# Altium PCB PCB1.PcbDoc
Units mil, origin at the board's own origin, x right, y up, seen from the top; angles counter-clockwise.
Board outline 6000 x 4000 mil, 4 copper layers (Top Layer 1, Top Layer, Bottom Layer, Bottom Layer 1), stack 23.756 mil thick; 108 components, 91 nets, 250 pads, 2 vias.
Unrouted connection lines stored in the file: 137.
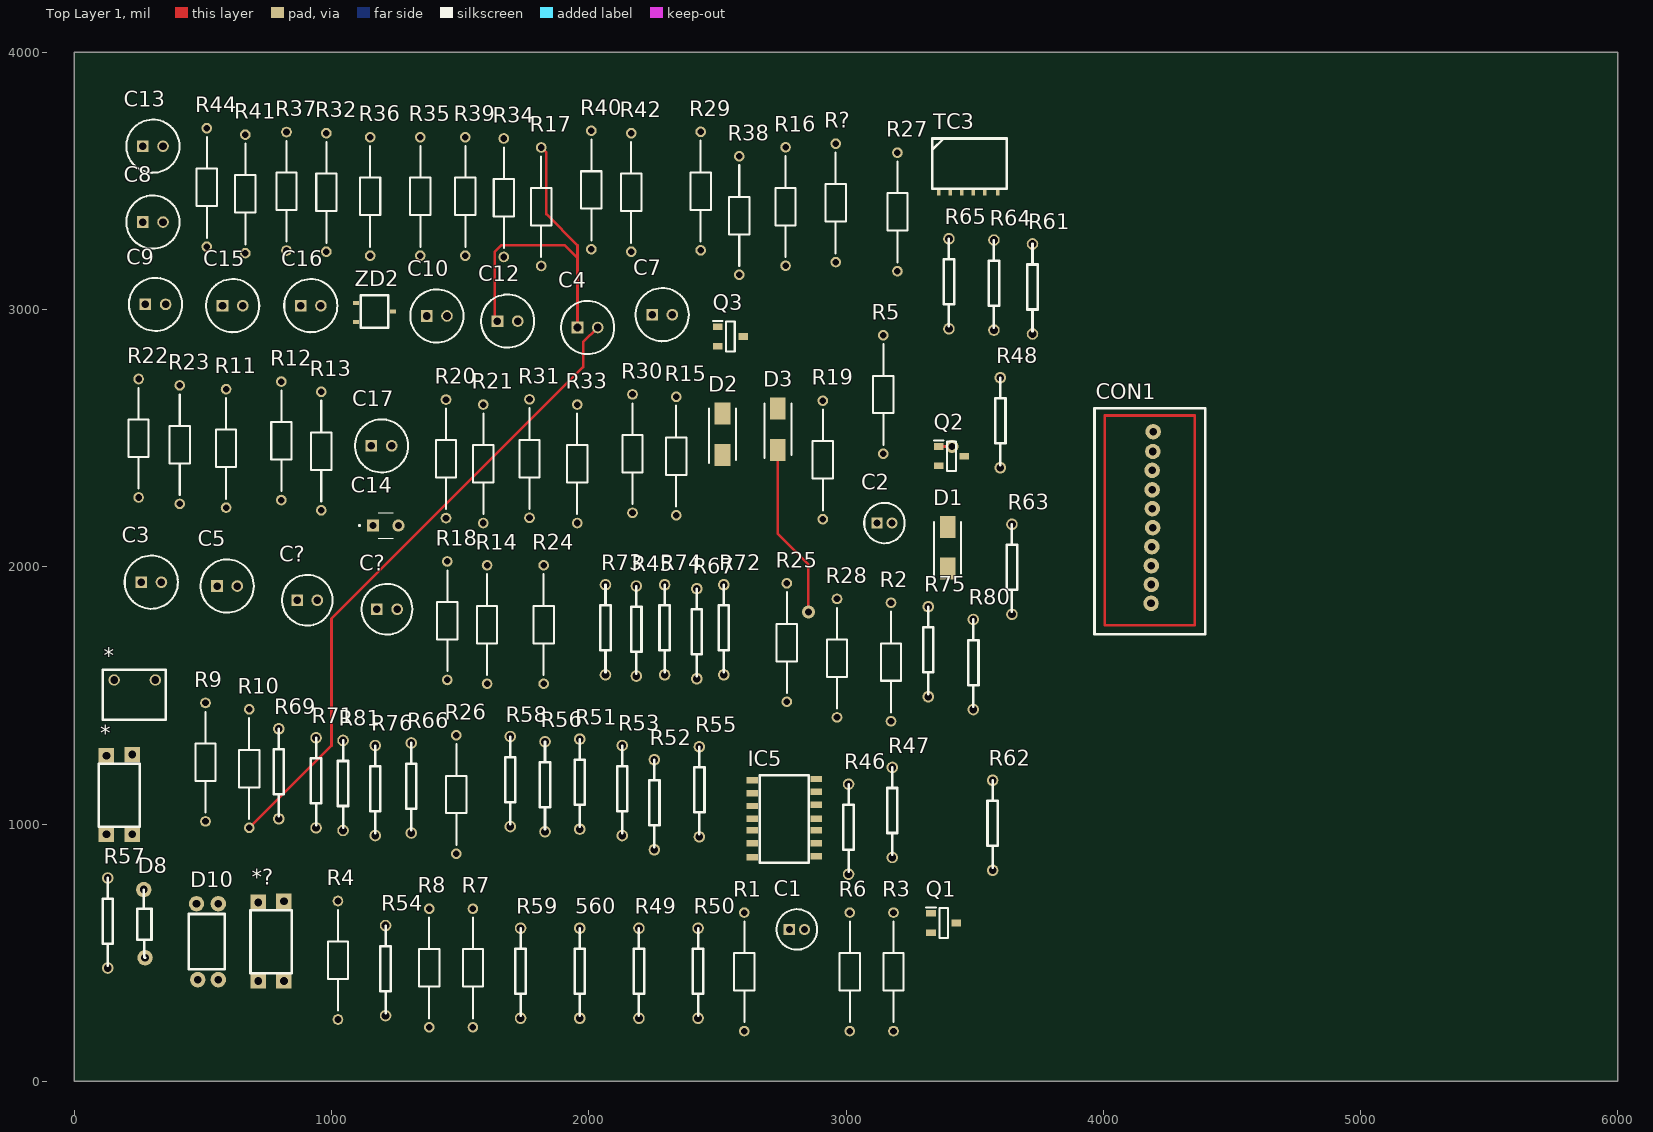
[diagram p0: Top Layer 1 view]
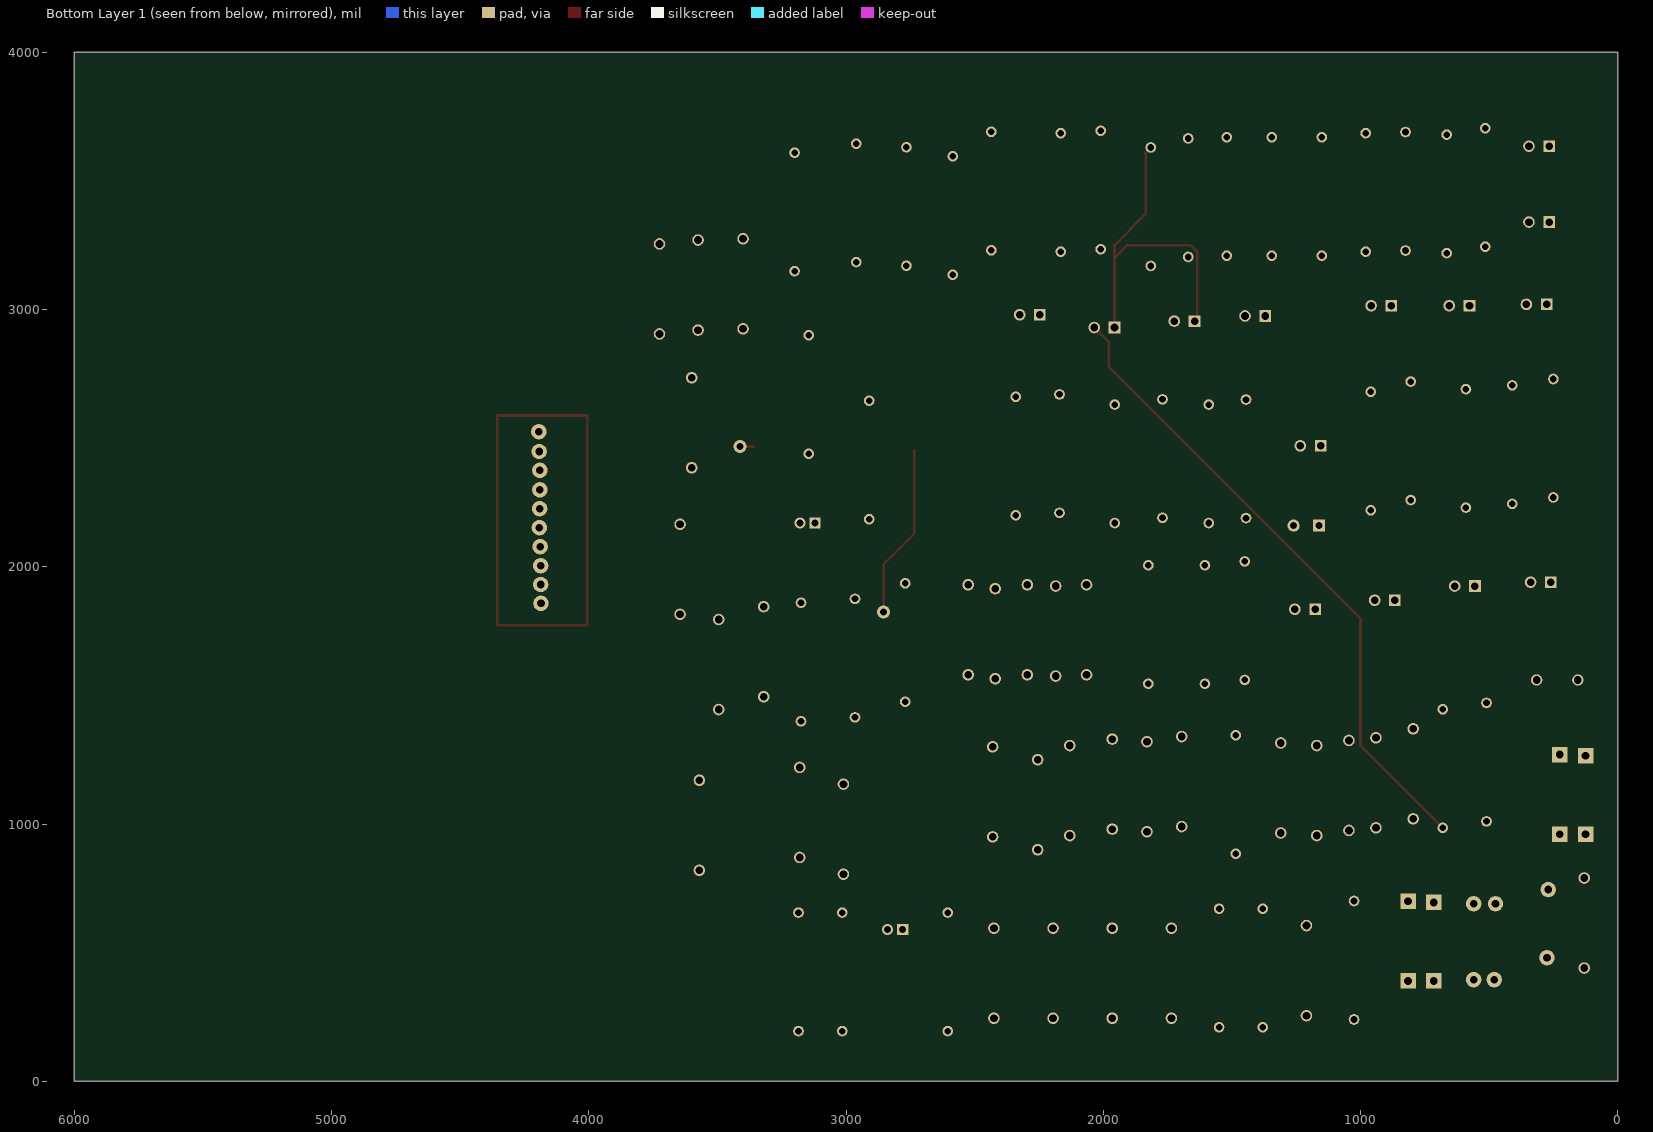
[diagram p1: Bottom Layer 1 view, seen from below]
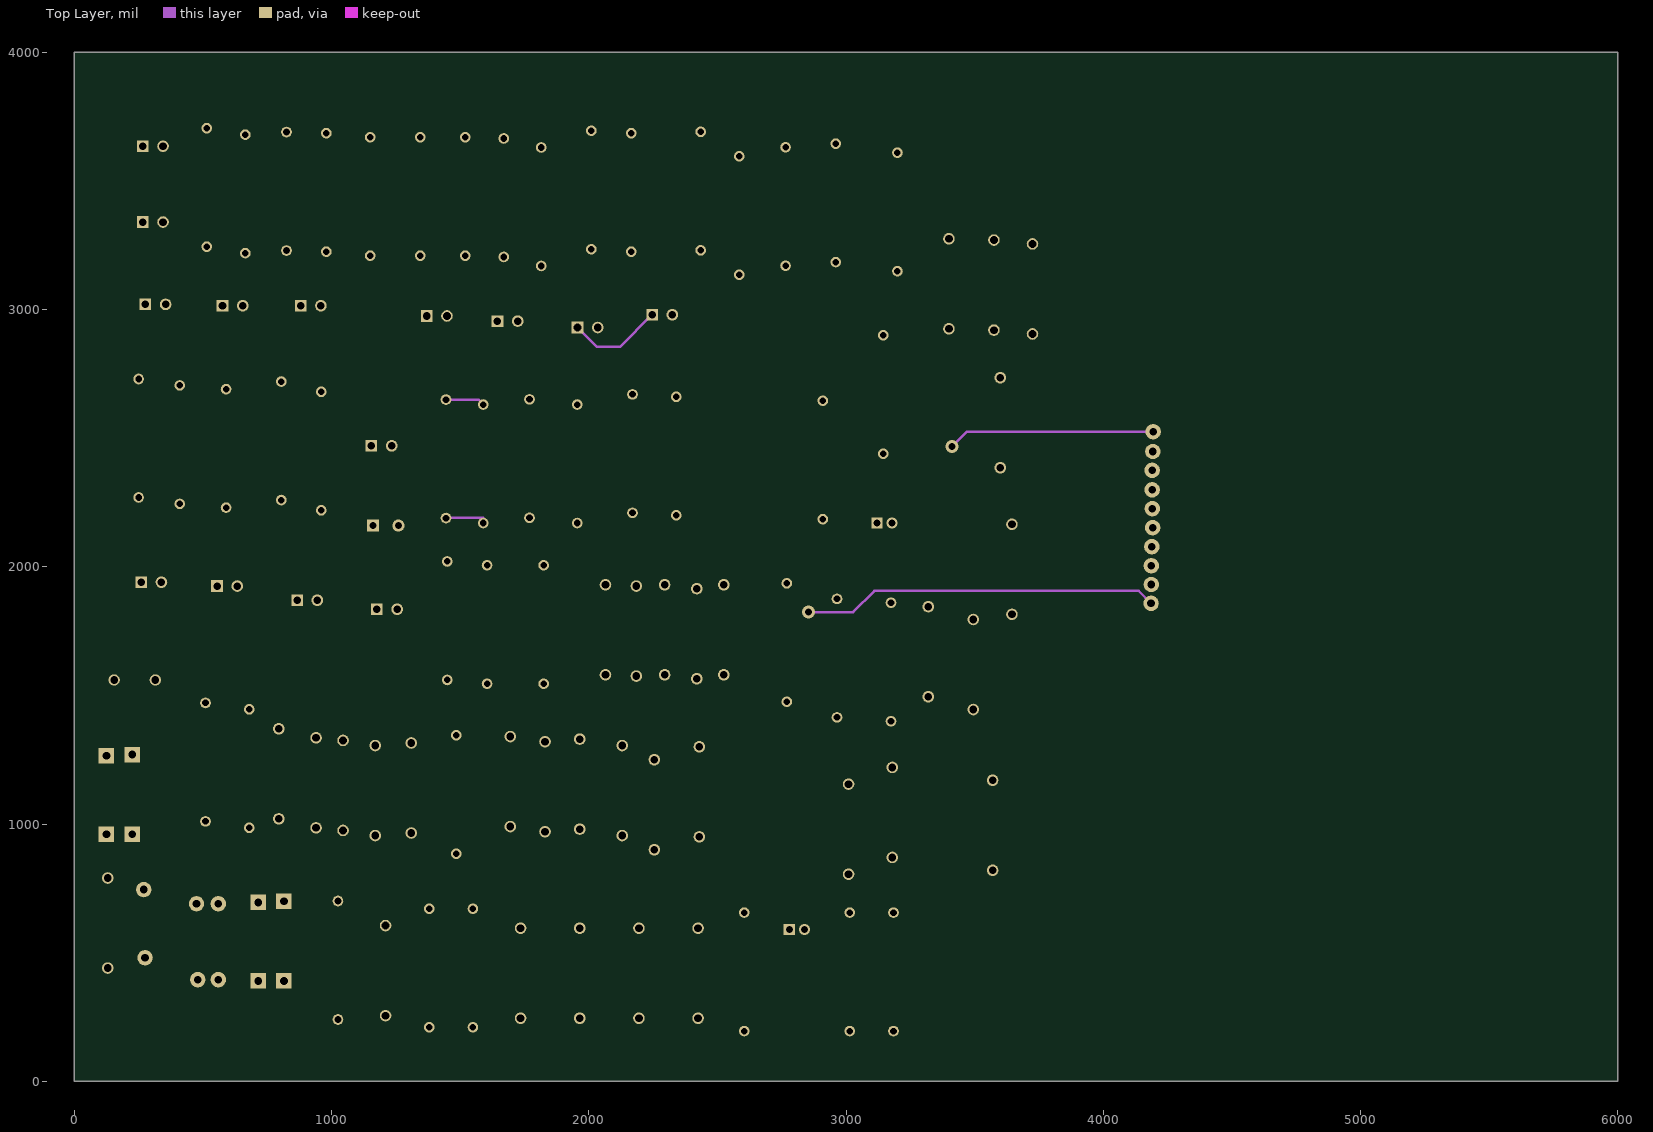
[diagram p2: Top Layer]

## Layer stack, top to bottom
Top Solder: solder mask 0.4, Solder Resist, Dk 3.5
Top Layer 1: signal copper 1.378
Dielectric 2: prepreg 2.8, PP-006, Dk 4.1
Top Layer: signal copper 1.4
Dielectric 1: dielectric 12.6, FR-4, Dk 4.8
Bottom Layer: signal copper 1.4
Dielectric 3: prepreg 2.8, PP-006, Dk 4.1
Bottom Layer 1: signal copper 1.378
Bottom Solder: solder mask 0.4, Solder Resist, Dk 3.5

## Board outline
0,0 6000,0 6000,4000 0,4000

## Design rules (kind name [scope] priority, off if disabled: settings)
Clearance [All] p1: gap=10 ignorepadtopadclearanceinfootprint=FALSE except(0: Arc-Hole Track-Hole SMDPad-Hole THPad-Hole Via-Hole Fill-Hole Poly-Hole Region-Hole Text-Hole)
PolygonConnect [All] p1: connectstyle=Relief reliefconductorwidth=10 reliefentries=4 polygonreliefangle="90 Angle" airgapwidth=10
RoutingVias [All] p1: holewidth=28 width=50 viastyle="Through Hole" minholewidth=28 minwidth=50 maxholewidth=28 maxwidth=50
SolderMaskExpansion [All] p1: expansion=4 istentingtop=FALSE
Width [All] p1: maxlimit=10 minlimit=10 preferedwidth=10
30 further rules are at their usual default settings.

## Classes and differential pairs
component class Sheet4: *? C38 C39 C40 C41 C42 D16 D17 D18 D21 D22 IC5 Q13 Q14 Q15 R66 R67 R69 R71 R72 R73 R74 R75 R76 R80 R81
component class Sheet3: 19 560 * *? BR2 C18 C19 C20 C21 C22 C23 C24 C25 C26 C27 C28 C29 C30 C31 C32 C33 C34 C35 C36 C37 D4 D5 D6 D7 D8 D9 D10 D11 D12 D13 D14 D15 D18 D20 IC4 Q11 Q12 R45 R46 R47 R48 R49 R50 R51 R52 R53 R54 R55 R56 R57 R58 R59 R61 R62 R63 R64 R65 R79 TC3
component class Sheet2: C15 C16 C17 CON1 D2 D3 Q3 R29 R30 R31 R32 R33 R34 R35 R36 R37 R38 R39 R40 R41 R42 R44 T7 T8 T9 T10 ZD2
component class Sheet1: * C1 C2 C3 C4 C5 C7 C8 C9 C10 C12 C13 C14 C? D1 IC KDS184 MDD? Q1 Q2 R1 R2 R3 R4 R5 R6 R7 R8 R9 R10 R11 R12 R13 R14 R15 R16 R17 R18 R19 R20 R21 R22 R23 R24 R25 R26 R27 R28 R? T? Z02W22VY

## Components (designator, comment, footprint, x,y, rotation, side; value= is the part's Value field where it differs from the comment)
560 "Component_1" PCBComponent_1#1 2065,410 r90 top
* "Component_1" PCBComponent_1#2 190,1110 r90 top
* "Component_1" PCBComponent_1#3 175,1495 r0 top
*? "Component_1" PCBComponent_1#2 780,540 r90 top
C1 "100nF" CAPPRD150W50D400H600 2779.65,590 r0 top
C2 "100nF" CAPPRD150W50D400H600 3120,2170 r0 top
C3 "1uF" CAPPRD200W55D525H1200 260,1940 r0 top
C4 "N.C" CAPPRD200W55D525H1200 1956.26,2930 r0 top
C5 "33nF" CAPPRD200W55D525H1200 555,1925 r0 top
C7 "10nF" CAPPRD200W55D525H1200 2246.26,2980 r0 top
C8 "0.1nF" CAPPRD200W55D525H1200 266.26,3340 r0 top
C9 "100nF" CAPPRD200W55D525H1200 276.26,3020 r0 top
C10 "1nF" CAPPRD200W55D525H1200 1370,2975 r0 top
C12 "100nF" CAPPRD200W55D525H1200 1645,2955 r0 top
C13 "1nF" CAPPRD200W55D525H1200 266.26,3635 r0 top
C14 "330pF" FA18 1161.58,2160 r0 top
C15 "105" CAPPRD200W55D525H1200 576.26,3015 r0 top
C16 "8.2UF" CAPPRD200W55D525H1200 880,3015 r0 top
C17 "1UF" CAPPRD200W55D525H1200 1155,2470 r0 top
C? "220nF" CAPPRD200W55D500H1250 1176.26,1835 r0 top
C? "220nF" CAPPRD200W55D500H1250 866.26,1870 r0 top
CON1 "SMAW200A" SMAW200A 4397,1752 r90 top
D1 "US1M" DIOM5127X229N 3395,2074.29 r90 top
D2 "US1M" DIOM5127X229N 2520,2515 r90 top
D3 "US1M" DIOM5127X229N 2735,2534.29 r90 top
D8 "zdm801" PCBComponent_1#4 380,650 r90 top
D10 "Component_1" PCBComponent_1#5 605,540 r90 top
IC5 "Component_1" PCBComponent_1#6 2760,1015 r0 top
Q1 "KTN2907AS" SOT95P245X130-3N 3379.65,615 r0 top
Q2 "MMBTA92" SOT95P245X130-3N 3410,2430 r0 top
Q3 "MMBTA92" SOT95P245X130-3N 2550.79,2895 r0 top
R1 "0J" RESAD1170W45L370D200 2604.65,195 r90 top
R2 "4.7KF" RESAD1170W45L370D200 3175,1399.37 r90 top
R3 "10KF" RESAD1170W45L370D200 3184.65,195 r90 top
R4 "10KF" RESAD1170W45L370D200 1025,240 r90 top
R5 "10KF" RESAD1170W45L370D200 3145,2439.37 r90 top
R6 "10KF" RESAD1170W45L370D200 3014.65,195 r90 top
R7 "1KF" RESAD1170W45L370D200 1549.65,210 r90 top
R8 "18KF" RESAD1170W45L370D200 1379.65,210 r90 top
R9 "1KF" RESAD1170W45L370D200 510,1010 r90 top
R10 "10KF" RESAD1170W45L370D200 680,985 r90 top
R11 "43KF" RESAD1170W45L370D200 590,2230 r90 top
R12 "N.C" RESAD1170W45L370D200 805,2259.37 r90 top
R13 "0J" RESAD1170W45L370D200 960,2219.37 r90 top
R14 "240KF" RESAD1170W45L370D200 1604.65,1545 r90 top
R15 "0J" RESAD1170W45L370D200 2340,2200 r90 top
R16 "62KF" RESAD1170W45L370D200 2765,3170 r90 top
R17 "N.C" RESAD1170W45L370D200 1815,3169.37 r90 top
R18 "51KF" RESAD1170W45L370D200 1450,1560 r90 top
R19 "10KF" RESAD1170W45L370D200 2910,2185 r90 top
R20 "100nF" RESAD1170W45L370D200 1445,2189.37 r90 top
R21 "8.2nF" RESAD1170W45L370D200 1590,2170 r90 top
R22 "10KF" RESAD1170W45L370D200 250,2269.37 r90 top
R23 "2W" RESAD1170W45L370D200 410,2244.37 r90 top
R24 "10KF" RESAD1170W45L370D200 1824.65,1545 r90 top
R25 "10KF" RESAD1170W45L370D200 2770,1475 r90 top
R26 "10KF" RESAD1170W45L370D200 1485,884.37 r90 top
R27 "10KF" RESAD1170W45L370D200 3200,3149.37 r90 top
R28 "10KF" RESAD1170W45L370D200 2965,1414.37 r90 top
R29 "3.3MF" RESAD1170W45L370D200 2435,3230 r90 top
R30 "3.3MF" RESAD1170W45L370D200 2170,2209.37 r90 top
R31 "51KF" RESAD1170W45L370D200 1769.65,2190 r90 top
R32 "130KF" RESAD1170W45L370D200 980,3225 r90 top
R33 "1MF" RESAD1170W45L370D200 1955,2170 r90 top
R34 "51KF" RESAD1170W45L370D200 1670,3204.37 r90 top
R35 "1KF" RESAD1170W45L370D200 1345,3209.37 r90 top
R36 "5.1KF" RESAD1170W45L370D200 1150,3209.37 r90 top
R37 "220J" RESAD1170W45L370D200 825,3229.37 r90 top
R38 "100KF" RESAD1170W45L370D200 2585,3135 r90 top
R39 "5.1J" RESAD1170W45L370D200 1520,3209.37 r90 top
R40 "51KF" RESAD1170W45L370D200 2010,3234.37 r90 top
R41 "1W" RESAD1170W45L370D200 665,3219.37 r90 top
R42 "1KF" RESAD1170W45L370D200 2165,3225 r90 top
R44 "1KF" RESAD1170W45L370D200 515,3244.37 r90 top
R45 "Component_1" PCBComponent_1#1 2285,1740 r90 top
R46 "Component_1" PCBComponent_1#1 3110,970 r90 top
R47 "Component_1" PCBComponent_1#1 3280,1035 r90 top
R48 "Component_1" PCBComponent_1#1 3700,2550 r90 top
R49 "Component_1" PCBComponent_1#1 2295,410 r90 top
R50 "Component_1" PCBComponent_1#1 2525,410 r90 top
R51 "Component_1" PCBComponent_1#1 2065,1145 r90 top
R52 "Component_1" PCBComponent_1#1 2355,1065 r90 top
R53 "Component_1" PCBComponent_1#1 2230,1120 r90 top
R54 "Component_1" PCBComponent_1#1 1310,420 r90 top
R55 "Component_1" PCBComponent_1#1 2530,1115 r90 top
R56 "Component_1" PCBComponent_1#1 1930,1135 r90 top
R57 "Component_1" PCBComponent_1#1 230,605 r90 top
R58 "Component_1" PCBComponent_1#1 1795,1155 r90 top
R59 "Component_1" PCBComponent_1#1 1835,410 r90 top
R61 "Component_1" PCBComponent_1#1 3825,3070 r90 top
R62 "Component_1" PCBComponent_1#1 3670,985 r90 top
R63 "Component_1" PCBComponent_1#1 3745,1980 r90 top
R64 "Component_1" PCBComponent_1#1 3675,3085 r90 top
R65 "Component_1" PCBComponent_1#1 3500,3090 r90 top
R66 "Component_1" PCBComponent_1#1 1410,1130 r90 top
R67 "Component_1" PCBComponent_1#1 2520,1730 r90 top
R69 "Component_1" PCBComponent_1#1 895,1185 r90 top
R71 "Component_1" PCBComponent_1#1 1040,1150 r90 top
R72 "Component_1" PCBComponent_1#1 2625,1745 r90 top
R73 "Component_1" PCBComponent_1#1 2165,1745 r90 top
R74 "Component_1" PCBComponent_1#1 2395,1745 r90 top
R75 "Component_1" PCBComponent_1#1 3420,1660 r90 top
R76 "Component_1" PCBComponent_1#1 1270,1120 r90 top
R80 "Component_1" PCBComponent_1#1 3595,1610 r90 top
R81 "Component_1" PCBComponent_1#1 1145,1140 r90 top
R? "1KF" RESAD1170W45L370D200 2960,3184.37 r90 top
TC3 "Component_1" PCBComponent_1#7 3450,3570 r0 top
ZD2 "KIA2431AS" KIA2431AS 1114,2930 r0 top

## Footprints (in the part's own frame and the unit in brackets; to place one, negate y for a bottom-side part, rotate by r counter-clockwise, add the part's x,y. Pads: shape width x height; smd on the part's side, far side on the other; paste and mask are expansions set on the pad)
CAPPRD150W50D400H600 [mm]
  rect 1.1x1.1 hole 0.7: 1(0,0)
  round 1.1 hole 0.7: 2(1.5,0)
  silkscreen extent -1.25,-2 2.75,2, body extent -1.5,-2.24 3,2.24, height 6
CAPPRD200W55D500H1250 [mm]
  rect 1.15x1.15 hole 0.75: 1(0,0)
  round 1.15 hole 0.75: 2(2,0)
  silkscreen extent -1.5,-2.5 3.5,2.5, body extent -1.74,-2.75 3.75,2.75, height 12.5
CAPPRD200W55D525H1200 [mm]
  rect 1.15x1.15 hole 0.75: 1(0,0)
  round 1.15 hole 0.75: 2(2,0)
  silkscreen extent -1.62,-2.62 3.63,2.62, body extent -1.74,-2.75 3.75,2.75, height 12
DIOM5127X229N [mm]
  rect 2.2x1.55 smd: 1(-2.05,0) 2(2.05,0)
  silkscreen extent -2.82,-1.33 2.55,1.33, body extent -2.55,-1.33 2.55,1.33, height 2.29
FA18 [mm]
  rect 1.2x1.2 hole 0.7: 1(0,0)
  round 1.2 hole 0.7: 2(2.5,0)
  silkscreen extent -1.4,-1.25 2,1.25, body extent -1.41,-1.25 3.87,1.25, height 5.69
KIA2431AS [mm]
  rect 0.55x0.4 smd: 1(-0.483,2.413) 2(-0.483,0.559) 3(3.175,1.575)
  silkscreen extent 0,0 2.69,3.17, body extent 0.13,0.13 2.59,3.05, height 1
PCBComponent_1#1 [mil]
  round 45 hole 30: 1(-165,100) 2(185,100)
  silkscreen extent -155,80 185,120
PCBComponent_1#2 [mil]
  rect 60x60 hole 30: 46(-150,65) 47(-150,-35) 48(155,65) 49(160,-35)
  silkscreen extent -120,-65 125,95
PCBComponent_1#3 [mil]
  round 44 hole 30: 1(-20,65) 2(140,65)
  silkscreen extent -65,-90 180,105
PCBComponent_1#4 [mil]
  round 60 hole 30: 1(-170,105) 2(95,110)
  silkscreen extent -170,80 95,135
PCBComponent_1#5 [mil]
  round 60 hole 30: 1(-145,125) 2(-145,45) 3(150,130) 4(150,45)
  silkscreen extent -105,20 110,160
PCBComponent_1#6 [mil]
  rect 45x25 smd: 1(-125,155) 2(125,160) 3(-125,105) 4(125,110) 5(-125,55) 6(125,60) 7(-125,5) 8(125,5) 9(-125,-40) 10(125,-40) 11(-125,-90) 12(125,-90) 13(-125,-145) 14(125,-140)
  silkscreen extent -95,-165 95,175
PCBComponent_1#7 [mil]
  rect 14x24 smd: 1(-90,-115) 2(-45,-115) 3(0,-115) 4(45,-115) 5(90,-115) 6(140,-115)
  silkscreen extent -115,-100 175,95
RESAD1170W45L370D200 [mm]
  round 1.05 hole 0.65: 1(0,0) 2(11.7,0)
  silkscreen extent 0.87,-1 10.83,1, body extent -0.23,-0.99 11.93,0.99, height 2
SMAW200A [mil]
  round 60 hole 30: 1(106,211) 2(179,210) 3(252,210) 4(326,208) 5(400,205) 6(474,206) 7(547,207) 8(623,207) 9(696,204) 10(773,203)
  Top Layer 1 lines w10: 20,391 20,41 836,41 836,391 20,391
  silkscreen extent -14,0 865,431, body extent -10,4 860,426, height 39
SOT95P245X130-3N [mm]
  rect 0.95x0.65 smd: 1(-1.25,0.95) 2(-1.25,-0.95) 3(1.25,0)
  silkscreen extent -1.73,-1.47 0.43,1.53, body extent -1.22,-1.47 1.22,1.47, height 1.3

## Part data
C1 C2: library part ECEA1HKS0R1, "Capacitor Polarised", Manufacturer_Name=Panasonic, Datasheet Link=https://componentsearchengine.com/Datasheets/2/ECEA1HKS0R1.pdf, Height=6mm, Manufacturer_Part_Number=ECEA1HKS0R1
C3 C4 C5 C7 C8 C9 C10 C12 C13 C15 C16 C17: library part ECA-1HM0R1, "Capacitor", Manufacturer_Name=Panasonic, Mouser Part Number=667-ECA-1HM0R1, Height=12mm, Manufacturer_Part_Number=ECA-1HM0R1, Mouser Price/Stock=https://www.mouser.com/Search/Refine.aspx?Keyword=667-ECA-1HM0R1
C14: library part FA18C0G1H331JNU06, "Capacitor", Manufacturer_Name=TDK, Mouser Part Number=810-FA18C0G1H331JNU6, Datasheet Link=https://product.tdk.com/system/files/dam/doc/product/capacitor/ceramic/lead-mlcc/catalog/leadmlcc_halogenfree_fa_en.pdf, Height=5.5mm, Manufacturer_Part_Number=FA18C0G1H331JNU06, Mouser Price/Stock=https://www.mouser.com/Search/Refine.aspx?Keyword=810-FA18C0G1H331JNU6
C? C?: library part EEUHD1HR22, "Capacitor Polarised", Manufacturer_Name=Panasonic, Datasheet Link=http://industrial.panasonic.com/cdbs/www-data/pdf/RDF0000/ABA0000C1035.pdf, Height=12.5mm, Manufacturer_Part_Number=EEUHD1HR22
D1 D2 D3: library part US1M-E3_61T, "Diode", Arrow Part Number=US1M-E3/61T, Manufacturer_Name=Vishay, Mouser Part Number=625-US1M-E3, Arrow Price/Stock=https://www.arrow.com/en/products/us1m-e361t/vishay?region=europe, Datasheet Link=https://componentsearchengine.com/Datasheets/2/US1M-E3_61T.pdf, Height=2.29mm, Manufacturer_Part_Number=US1M-E3/61T, Mouser Price/Stock=https://www.mouser.co.uk/ProductDetail/Vishay-General-Semiconductor/US1M-E3-61T?qs=D6r9GjgEnNOosWuyVR8q1A%3D%3D
Q1 Q2 Q3: "Transistor BJT PNP", Manufacturer_Name=KEC, Height=1.3mm
  Q1: Datasheet Link=https://4donline.ihs.com/images/VipMasterIC/IC/KECC/KECC-S-A0011628695/KECC-S-A0011628695-1.pdf?hkey=EF798316E3902B6ED9A73243A3159BB0, Manufacturer_Part_Number=KTN2907AS
  Q2 Q3: Datasheet Link=https://www.alldatasheet.com/datasheet-pdf/pdf/69996/KEC/MMBTA92.html, Manufacturer_Part_Number=MMBTA92
R1 R2 R3 R4 R5 R6 R7 R8 R9 R10 R11 R12 R13 R14 R15 R16 R17 R18 R19 R20 R21 R22 R23 R24 R25 R26 R27 R28 R29 R30 R31 R32 R33 R34 R35 R36 R37 R38 R39 R40 R41 R42 R44 R?: library part MFR3-10KFC, "Resistor", Manufacturer_Name="TT Electronics", Mouser Part Number=756-MFR3-10KFC, Arrow Part Number=MFR3-10KFC, Arrow Price/Stock=https://www.arrow.com/en/products/mfr3-10kfc/welwyn-components?region=europe, Datasheet Link=https://componentsearchengine.com/Datasheets/2/MFR3-10KFC.pdf, Manufacturer_Part_Number=MFR3-10KFC, Mouser Price/Stock=https://www.mouser.co.uk/ProductDetail/Welwyn-Components-TT-Electronics/MFR3-10KFC?qs=i9QNUsDsAPN%252BMi4lKUEV5Q%3D%3D

## Via types
v1: diameter 50, hole 28, Top Layer 1 to Bottom Layer 1, 2 vias

## Nets (pads, with @x,y where several pads share a name; then routed paths per layer and width w, separated by ;. In a path a pad name is that pad's centre, name@x,y a point inside that pad or via, vN(x,y) a via of type N, cw(c..) or ccw(c..) an arc to the next point about the centre after c; other vN are vias at no path point)
GND: C1.2 C2.1 C2.2 C3.1 C4.1 C5.1 C7.1 C8.1 C9.1 C10.1 C12.1 C13.1 C14.2 C15.1 C16.1 C?.2 CON1.10 Q2.1 Q2.2 R2.1 R5.1 R5.2 R8.1 R11.1 R12.1 R13.1 R17.2 R20.2 R21.2 R22.2 R23.2 R32.2 R41.1 | length 2775.2
  Top Layer 1 w10: C12.1 1634,2955 1634,3224 1660,3250 1906.26,3250 1956.26,3200 ; R17.2 1835,3610 1835,3371 1956.26,3249.74 1956.26,3200 ; C4.1 1956.26,3200 ; Q2.1 v1(3412.6,2467.4)
  Top Layer w10: R20.2 1570.63,2650 R21.2 ; C4.1 2031.26,2855 2121.26,2855 C7.1 ; v1(3412.6,2467.4) 3470.2,2525 CON1.10
Net19_1: R50.1
Net19_2: 
Net560_1: 560.1 R59.1
Net560_2: 560.2 IC5.8 IC5.10 IC5.12 R54.2 R55.1 R57.1 R58.1 R59.2 R69.2 R71.2 R72.2
Net*?_1: R65.1 R67.2
Net*?_2: 
NetBR2_1: 
NetBR2_2: D8.2 D10.2 R48.1 R49.1 R51.2 TC3.4
NetC1_1: C1.1 Q1.3 R42.2 R?.1
NetC3_2: C3.2 R?.2
NetC4_2: C4.2 R10.1 | length 2506.3
  Top Layer 1 w10: R10.1 1000,1305 1000,1798 1978,2776 1978,2873 C4.2
NetC5_2: C5.2 R12.2 R44.1
NetC7_2: C7.2 R16.2
NetC8_2: C8.2 R9.2 R15.1 R17.1 R18.2
NetC9_2: C9.2 R16.1 R18.1 R24.1
NetC10_2: C10.2 R25.1 R26.1
NetC12_2: C12.2 R19.1 R20.1 R21.1 | length 165.3
  Top Layer w10: R20.1 1445.63,2190 1590,2190 R21.1
NetC13_2: C13.2 R37.1
NetC14_1: C14.1 R31.2 R32.1
NetC15_2: C15.2 C16.2 D1.1 D2.2 Q3.2 R29.1 R38.1 R40.1
NetC17_1: C17.1 CON1.1 D3.1 ZD2.2 | length 2064.7
  Top Layer 1 w10: D3.1 2735,2128 2854,2009 v1(2854,1824)
  Top Layer w10: v1(2854,1824) 3028,1824 3110,1906 4138,1906 CON1.1
NetC17_2: C17.2 R40.2 ZD2.3
NetC20_1: R45.2 R47.1
NetC21_2: 
NetC23_2: R51.1 TC3.2
NetC24_2: TC3.1
NetC25_2: D8.1 D10.1 TC3.5
NetC26_2: R50.2 TC3.3
NetC30_1: R48.2
NetC31_1: 
NetC33_1: R55.2 R57.2 R58.2
NetC33_2: R53.2
NetC34_2: D10.4 R52.2 R53.1
NetC37_2: R62.2 R63.2
NetC38_1: R66.1
NetC39_2: R69.1 R81.1
NetC40_2: IC5.6 IC5.11 IC5.13 R2.2 R6.2 R72.1 R74.1
NetC41_1: R76.2
NetC41_2: R76.1 R80.1
NetC42_1: IC5.9
NetC42_2: IC5.1 IC5.3 IC5.5 IC5.7 R67.1 R73.2 R75.1
NetC?_1: C?.1@1176.26,1835
NetCON1_7: CON1.7
NetD1_2: D1.2 R22.1 R27.1
NetD2_1: D2.1 D3.2
NetD4_1: 
NetD4_2: 
NetD5_2: 
NetD9_2: 
NetD10_3: D10.3 R52.1 R54.1 R56.1
NetD11_1: R64.1
NetD12_2: 
NetD18_2: R73.1 R74.2
NetD21_1: R80.2
NetD21_2: R15.2
NetD22_2: R1.2 R34.2
NetIC1_2: R11.2
NetIC1_11: R35.1 R36.1
NetIC2_5: 
NetIC5_2: IC5.2 R6.1 R7.2 R8.2
NetIC5_14: IC5.14 R71.1 R81.2
NetQ1_1: Q1.1 R3.2
NetQ1_2: Q1.2 R3.1 R4.2
NetQ2_3: Q2.3
NetQ3_1: Q3.1 R38.2 R39.1
NetQ3_3: Q3.3 R33.1
NetQ11_1: R61.2
NetQ11_2: R63.1 R64.2
NetQ13_1: R66.2
NetQ15_1: R56.2
NetR1_1: R1.1
NetR4_1: R4.1
NetR7_1: R7.1 R9.1
NetR10_2: R10.2 R23.1
NetR13_2: R13.2 R14.2
NetR24_2: R24.2 R25.2 R26.2
NetR27_2: R27.2 R28.2
NetR28_1: R28.1
NetR29_2: R29.2 R30.1
NetR30_2: R30.2 R31.1
NetR33_2: R33.2 R34.1
NetR35_2: R35.2
NetR36_2: R36.2
NetR37_2: R37.2 R41.2
NetR39_2: R39.2 ZD2.1
NetR42_1: R42.1
NetR44_2: R44.2
NetR45_1: R45.1 R46.2
NetR46_1: R46.1 R47.2
NetR49_2: R49.2 TC3.6
pads on no net: *.1 *.2 *.46 *.47 *.48 *.49 *?.46 *?.47 *?.48 *?.49 C?.1@866.26,1870 CON1.2 CON1.3 CON1.4 CON1.5 CON1.6 CON1.8 CON1.9 IC5.4 R14.1 R19.2 R61.1 R62.1 R65.2 R75.2